# Altium PCB KNoT-Gateway Starter Board.PcbDoc
Units mm, origin at the board's own origin, x right, y up, seen from the top; angles counter-clockwise.
Board outline 56.06 x 92.56 mm, 2 copper layers (Top Layer, Bottom Layer); 37 components, 25 nets, 235 pads, 26 vias.
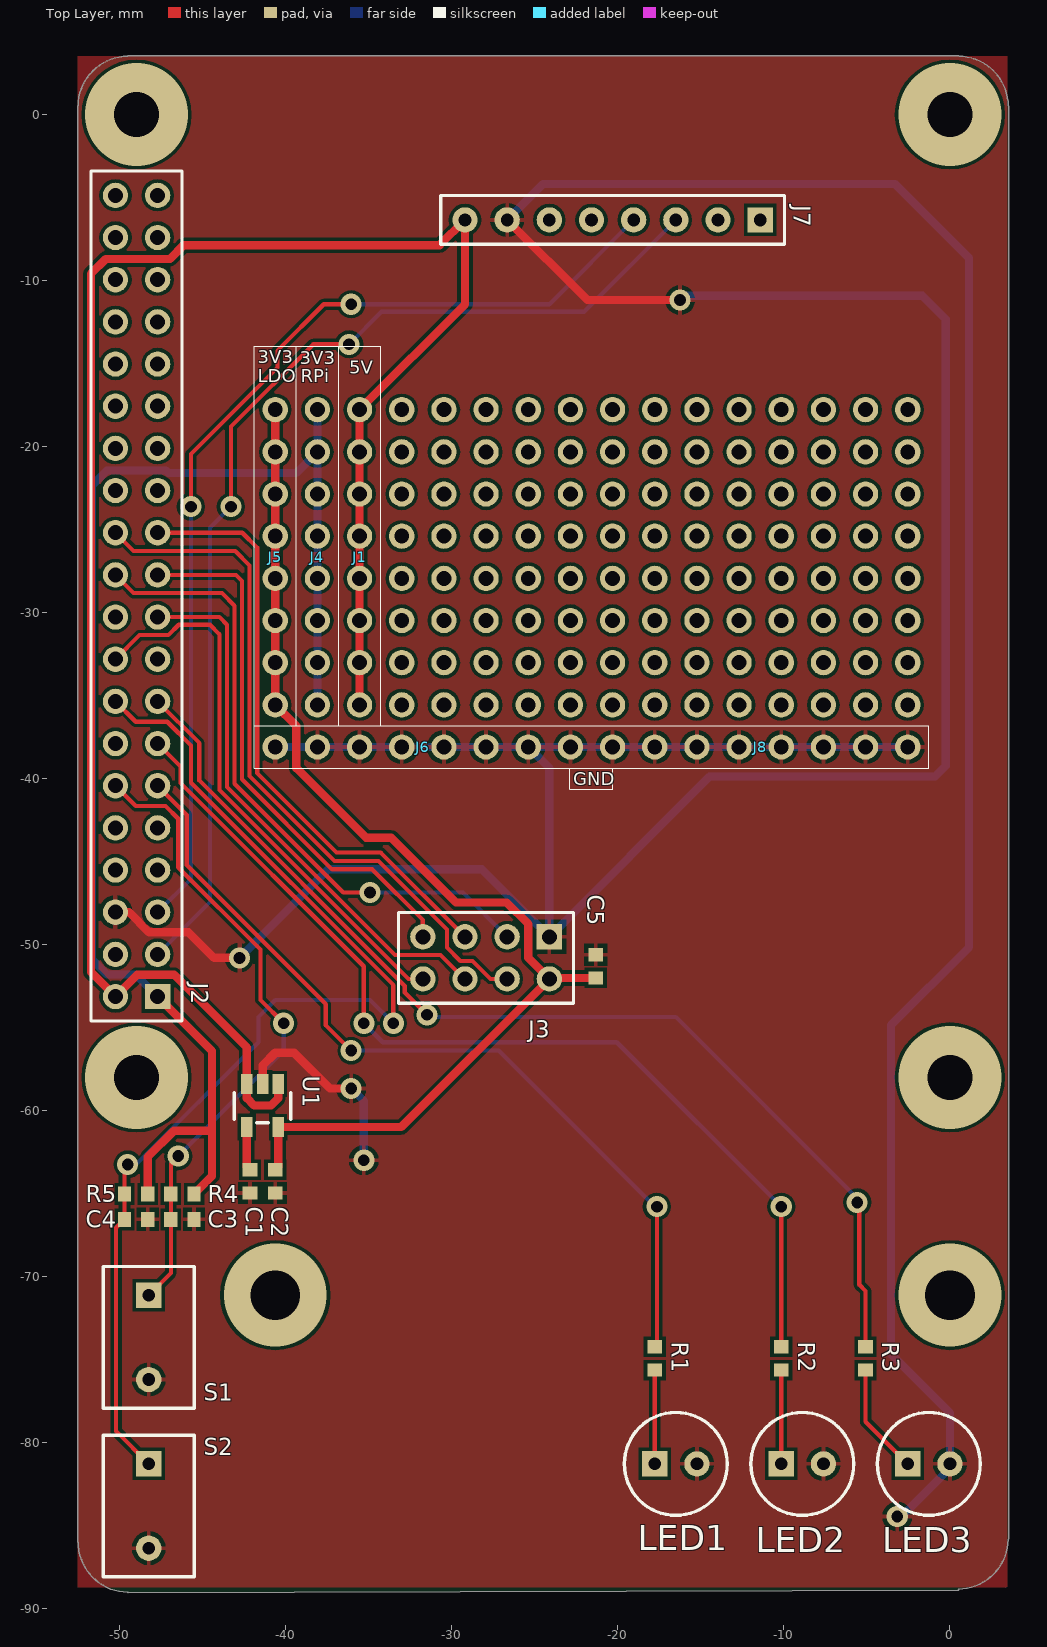
[diagram p0: Top Layer view]
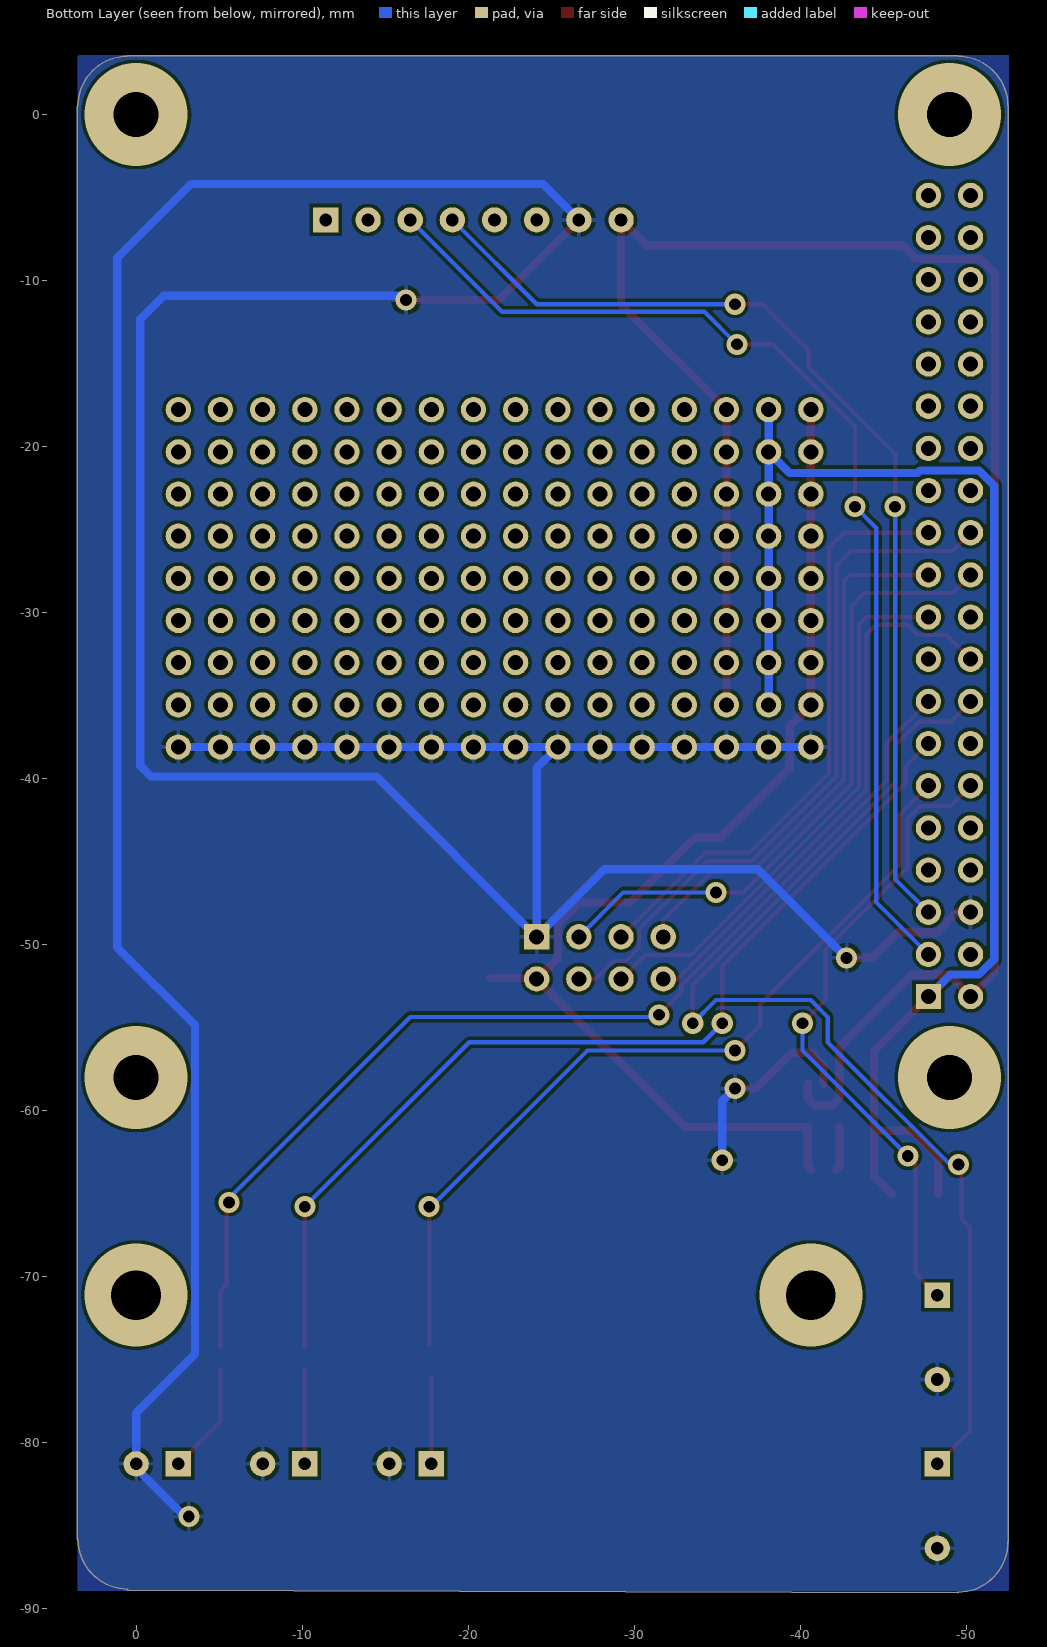
[diagram p1: Bottom Layer view, seen from below]

## Layer stack, top to bottom
Top Solder: solder mask 0.0102, Solder Resist, Dk 3.5
Top Layer: signal copper 0.0356
Dielectric 1: dielectric 0.32, FR-4, Dk 4.8
Bottom Layer: signal copper 0.0356
Bottom Solder: solder mask 0.0102, Solder Resist, Dk 3.5

## Board outline
-52.515,-85.996 cw(c-52.502,-85.996) -52.509,-85.985 cw(c-52.5,-85.954) -52.532,-85.954 -52.532,0.5 cw(c-52.5,0.5) -52.513,0.53 cw(c-49.5,0.5) -49.53,3.513 cw(c-49.5,3.5) -49.5,3.532 0.5,3.532 cw(c0.5,3.5) 0.53,3.513 cw(c0.5,0.5) 3.513,0.529 cw(c3.5,0.5) 3.532,0.5 3.532,-58.496 cw(c3.5,-58.5) 3.532,-58.5 3.532,-85.798 cw(c3.5,-85.798) 3.503,-85.831 cw(c0.49,-85.808) 0.513,-88.821 cw(c0.5,-88.851) 0.532,-88.851 cw(c0.5,-88.851) 0.5,-88.884 -49.502,-89.028 cw(c-49.502,-88.996) -49.531,-89.009 cw(c-49.502,-85.996)

## Design rules (kind name [scope] priority, off if disabled: settings)
Clearance [All] p1: gap=0.2
ComponentClearance [All] p1: gap=0.254 collisioncheckmode=3 verticalgap=0.254 showdistances=TRUE
HoleSize [All] p1: absolutevalues=TRUE maxlimit=3 minlimit=0.3 maxpercent=80.000 minpercent=20.000
MinimumAnnularRing [All] p1: minimumring=0.2
MinimumSolderMaskSliver [All] p1: minsoldermaskwidth=0.064
PermittedLayers [All] p1: toplayerpermitted=TRUE bottomlayerpermitted=TRUE
PolygonConnect [All] p1: connectstyle=Relief reliefconductorwidth=0.254 reliefentries=4 polygonreliefangle="90 Angle" airgapwidth=0.254
RoutingVias [All] p1: holewidth=0.711 width=1.27 viastyle="Through Hole" minholewidth=0.711 minwidth=1.27 maxholewidth=0.711 maxwidth=1.27
SilkToSilkClearance [All] p1: silktosilkclearance=0.064
SilkToSolderMaskClearance [IsPad] p1: minsilkscreentomaskgap=0.064 clearancetoexposedcopper=TRUE
SolderMaskExpansion [All] p1: expansion=0.203
Width Width_Power [InNetClass('Power')] p1: maxlimit=0.5 minlimit=0.254 preferedwidth=0.5 minimp=50.000000 maximp=50.000000 favimp=50.000000
Width [All] p2: maxlimit=0.5 minlimit=0.2 preferedwidth=0.254 minimp=50.000000 maximp=50.000000 favimp=50.000000
24 further rules are at their usual default settings.

## Classes and differential pairs
component class "KNoT-Gateway Starter Board": C1 C2 C3 C4 C5 J1 J2 J3 J4 J5 J6 J7 J8 LED1 LED2 LED3 R1 R2 R3 R4 R5 S1 S2 U1

## Components (designator, comment, footprint, x,y, rotation, side; value= is the part's Value field where it differs from the comment)
C1 "Cap0603" CAPC1608L -42.164,-64.262 r270 top
C2 "Cap0603" CAPC1608L -40.64,-64.262 r270 top
C3 "Cap0603" CAPC1608L -46.228,-66.548 r0 top
C4 "Cap0603" CAPC1608L -49.022,-66.548 r0 top
C5 "Cap0603" CAPC1608L -21.336,-51.308 r90 top
J1 "Prototype Power Header" "Prototype Holes 1X8" -35.56,-17.78 r270 top
J2 "Extended Male/Female Header" "FEMALE HEADER 2X20" -48.995,-29 r90 top locked
J3 "nRF24L01+" nRF24L01+PA+LNA -27.94,-50.8 r0 top
J4 "Prototype Power Header" "Prototype Holes 1X8" -38.1,-17.78 r270 top
J5 "Prototype Power Header" "Prototype Holes 1X8" -40.64,-17.78 r270 top
J6 "Prototype Power Header" "Prototype Holes 1X8" -40.64,-38.1 r0 top
J7 "1x8 Extended Female Header" NFC_ITEAD_PN532 0,0 r0 top
J8 "Prototype Power Header" "Prototype Holes 1X8" -20.32,-38.1 r0 top
LED1 "LED PTH" "LED PTH" -17.78,-81.28 r0 top
LED2 "LED PTH" "LED PTH" -10.16,-81.28 r0 top
LED3 "LED PTH" "LED PTH" -2.54,-81.28 r0 top
R1 "RES_0402" CAPC1608L -17.78,-74.93 r90 top
R2 "RES_0402" CAPC1608L -10.16,-74.93 r90 top
R3 "RES_0402" CAPC1608L -5.08,-74.93 r90 top
R4 "RES_0402" CAPC1608L -46.228,-65.024 r180 top
R5 "RES_0402" CAPC1608L -49.022,-65.024 r180 top
S1 "200mils Push Button PTH" "Push-Button PTH" -48.26,-71.12 r270 top
S2 "200mils Push Button PTH" "Push-Button PTH" -48.26,-81.28 r270 top
U1 "MIC5205-3.3Y" SOT23-5 -41.402,-59.69 r180 top
? "Comment" "Prototype Holes 1X8" -2.54,-17.78 r270 top
? "Comment" "Prototype Holes 1X8" -5.08,-17.78 r270 top
? "Comment" "Prototype Holes 1X8" -7.62,-17.78 r270 top
? "Comment" "Prototype Holes 1X8" -10.16,-17.78 r270 top
? "Comment" "Prototype Holes 1X8" -12.7,-17.78 r270 top
? "Comment" "Prototype Holes 1X8" -15.24,-17.78 r270 top
? "Comment" "Prototype Holes 1X8" -17.78,-17.78 r270 top
? "Comment" "Prototype Holes 1X8" -20.32,-17.78 r270 top
? "Comment" "Prototype Holes 1X8" -22.86,-17.78 r270 top
? "Comment" "Prototype Holes 1X8" -25.4,-17.78 r270 top
? "Comment" "Prototype Holes 1X8" -27.94,-17.78 r270 top
? "Comment" "Prototype Holes 1X8" -30.48,-17.78 r270 top
? "Comment" "Prototype Holes 1X8" -33.02,-17.78 r270 top

## Footprints (in the part's own frame and the unit in brackets; to place one, negate y for a bottom-side part, rotate by r counter-clockwise, add the part's x,y. Pads: shape width x height; smd on the part's side, far side on the other; paste and mask are expansions set on the pad)
CAPC1608L [mm]
  rect 0.8x0.9 smd: 1(-0.7,0) 2(0.7,0)
  body extent -0.87,-0.48 0.87,0.48, height 0.85
"FEMALE HEADER 2X20" [mil] "Female Header 2x20, 2.54mm pitch"
  rect 60x60 hole 35.43: 1(-950,-50)
  round 60 hole 35.43: 2(-950,50) 3(-850,-50) 4(-850,50) 5(-750,-50) 6(-750,50) 7(-650,-50) 8(-650,50) 9(-550,-50) 10(-550,50) 11(-450,-50) 12(-450,50) 13(-350,-50) 14(-350,50) 15(-250,-50) 16(-250,50) 17(-150,-50) 18(-150,50) 19(-50,-50) 20(-50,50) 21(50,-50) 22(50,50) 23(150,-50) 24(150,50) 25(250,-50) 26(250,50) 27(350,-50) 28(350,50) 29(450,-50) 30(450,50) 31(550,-50) 32(550,50) 33(650,-50) 34(650,50) 35(750,-50) 36(750,50) 37(850,-50) 38(850,50) 39(950,-50) 40(950,50)
  silkscreen extent -1008,-108 1008,108, body extent -997,-102 997,100, height 380
"LED PTH" [mil]
  rect 60x60 hole 30: 1(0,0)
  round 60 hole 30: 2(100,0)
  silkscreen extent -72,-122 172,122, body extent -28,-59 128,79, height 212
NFC_ITEAD_PN532 [mil]
  rect 60x60 hole 30: 1(-450,-250)
  round 60 hole 30: 2(-550,-250) 3(-650,-250) 4(-750,-250) 5(-850,-250) 6(-950,-250) 7(-1050,-250) 8(-1150,-250)
  silkscreen extent -1208,-308 -392,-192, body extent -1750,-3000 150,100, height 591
nRF24L01+PA+LNA [mil] "nRF24L01+PA+LNA MODULE"
  rect 60x60 hole 35.43: 1(150,50)
  round 60 hole 35.43: 2(150,-50) 3(50,50) 4(50,-50) 5(-50,50) 6(-50,-50) 7(-150,50) 8(-150,-50)
  silkscreen extent -208,-108 207,108, body extent -302,-2439 292,125, height 232
"Prototype Holes 1X8" [mil] "Holes1X8"
  round 60 hole 35.43: 1(0,0) 2(100,0) 3(200,0) 4(300,0) 5(400,0) 6(500,0) 7(600,0) 8(700,0)
"Push-Button PTH" [mil]
  rect 60x60 hole 30: 1(0,0)
  round 60 hole 30: 2(200,0)
  silkscreen extent -68,-108 268,108, body extent -60,-100 260,100, height 130
SOT23-5 [mm]
  rect 0.69x1.2 smd: 1(-0.95,-1.3) 2(0,-1.3) 3(0.95,-1.3) 4(0.95,1.3) 5(-0.95,1.3)
  silkscreen extent -1.7,-0.77 1.7,1.05, body extent -1.5,-1.25 1.5,1.25, height 1.05

## Part data
C1 C2 C3 C4 C5: "4.7µF 10V Ceramic Capacitor X5R 0603"
J2: library part RPI2_GPIO, "RPi GPIO HEADER 2X20"
J3: "nRF24L01 2x4 HEADER"
J7: library part PN532_NFC, "PN532_NFC"
LED1 LED2 LED3: library part "LED 0603"
R1 R2 R3 R4 R5: "Precision Thick Film Chip Resistor, 10 Ohm to 1M Ohm Range, 1% and 0.5% Tolerance, 0805 Size, 1/8 W"
S1 S2: library part "Push-Button PTH", "Push Button"
U1: library part MIC5205-3V3, "MIC5205-3.3Y LDO"

## Via types
v1: diameter 1.27, hole 0.711, Top Layer to Bottom Layer, 20 vias
v2: diameter 6.2, hole 2.7, Top Layer to Bottom Layer, 4 vias
v3: diameter 6.2, hole 3, Top Layer to Bottom Layer, 2 vias

## Nets (pads, with @x,y where several pads share a name; then routed paths per layer and width w, separated by ;. In a path a pad name is that pad's centre, name@x,y a point inside that pad or via, vN(x,y) a via of type N, cw(c..) or ccw(c..) an arc to the next point about the centre after c; other vN are vias at no path point)
3V3_LDO: C2.1 C5.1 J3.2 J5.1 J5.2 J5.3 J5.4 J5.5 J5.6 J5.7 J5.8 U1.5 | length 69.3
  Top Layer w0.5: C2.1 -40.452,-63.374 U1.5 -33.05,-60.99 J3.2 ; J5.1 J5.2 J5.3 J5.4 J5.5 J5.6 J5.7 J5.8 -39.37,-36.83 -39.37,-39.37 -35.179,-43.561 -33.655,-43.561 -29.75,-47.466 -26.702,-47.466 -25.4,-48.768 -25.4,-50.8 J3.2 ; C5.1 -24.068,-52.008 J3.2
3V3_RPI: J2.1 J4.1 J4.2 J4.3 J4.4 J4.5 J4.6 J4.7 J4.8 R4.1 R5.1 | length 86.2
  Top Layer w0.5: R5.1 -48.322,-62.8 -46.736,-61.214 -44.45,-61.214 ; J2.1 -44.45,-56.405 -44.45,-61.214 ; R4.1 -44.45,-63.946 -44.45,-61.214
  Bottom Layer w0.5: J2.1@-47.73,-53.13 -49.058,-51.802 -50.772,-51.802 -51.689,-50.885 -51.689,-22.352 -50.775,-21.438 -47.228,-21.438 -47.076,-21.59 -39.37,-21.59 J4.2 ; J4.8 J4.7 J4.6 J4.5 J4.4 J4.3 J4.2 ; J4.1 J4.2
5V: J1.1 J1.2 J1.3 J1.4 J1.5 J1.6 J1.7 J1.8 J2.2 J7.8 U1.1 U1.3 | length 116.3
  Top Layer w0.5: U1.1 -40.452,-59.248 -40.894,-59.69 -41.91,-59.69 -42.352,-59.248 U1.3 -42.352,-56.2 -46.736,-51.816 -48.951,-51.816 J2.2 -51.579,-51.816 -51.584,-51.816 -51.738,-51.662 -51.738,-9.588 -50.85,-8.7 -46.978,-8.7 -46.152,-7.874 -30.734,-7.874 J7.8 -29.21,-11.43 J1.1 J1.2 J1.3 J1.4 J1.5 J1.6 J1.7 J1.8
GND: C1.2 C2.2 C3.2 C4.2 C5.2 J2.6 J3.1 J6.1 J6.2 J6.3 J6.4 J6.5 J6.6 J6.7 J6.8 J7.7 J8.1 J8.2 J8.3 J8.4 J8.5 J8.6 J8.7 J8.8 LED1.2 LED2.2 LED3.2 S1.2 S2.2 U1.2 | length 289.8
  Top Layer w0.5: J2.6@-50.27,-48.05 -49.444,-48.05 -48.232,-49.262 -45.861,-49.262 -44.323,-50.8 v1(-42.799,-50.8) ; U1.2 -41.402,-57.277 -40.64,-56.515 -39.497,-56.515 -37.338,-58.674 v1(-36.068,-58.674) ; J7.7 -21.844,-11.176 v1(-16.256,-11.176) ; LED1.2@-15.62,-81.28 LED1.2 ; LED2.2@-7.62,-81.661 LED2.2
  Bottom Layer w0.5: v1(-42.799,-50.8) -37.465,-45.466 -28.194,-45.466 J3.1 ; J6.1 J6.2 J6.3 J6.4 J6.5 J6.6 J6.7 ; v1(-36.068,-58.674) -35.306,-59.436 v1(-35.306,-62.992) ; J7.7 -24.511,-4.191 -3.302,-4.191 1.143,-8.636 1.143,-50.165 -3.55,-54.858 -3.55,-74.67 0,-78.22 LED3.2 0,-81.534 -3.048,-84.582 v1(-3.175,-84.455) ; v1(-16.256,-11.176) -16.002,-10.922 -1.651,-10.922 -0.254,-12.319 -0.254,-39.243 -0.889,-39.878 -14.478,-39.878 J3.1 ; J8.8 J8.7 J8.6 J8.5 J8.4 J8.3 J8.2 J8.1 J6.8 J6.7 ; J6.7 -24.13,-39.37 J3.1
LED1: J2.11 R1.2 | length 51.4
  Top Layer w0.254: J2.11@-47.73,-40.43 -45.974,-42.186 -45.974,-45.212 -37.592,-53.594 -37.592,-54.864 v1(-36.068,-56.388) ; R1.2@-17.653,-74.103 v1(-17.653,-65.786)
  Bottom Layer w0.254: v1(-36.068,-56.388) -27.178,-56.388 -17.78,-65.786 v1(-17.653,-65.786)
LED2: J2.13 R2.2 | length 60.2
  Top Layer w0.254: J2.13@-47.73,-37.89 -46.355,-39.265 -46.355,-40.259 -35.306,-51.308 v1(-35.306,-54.737) ; R2.2 v1(-10.16,-65.786)
  Bottom Layer w0.254: v1(-35.306,-54.737) -34.163,-55.88 -20.066,-55.88 v1(-10.16,-65.786)
LED3: J2.15 R3.2 | length 65.3
  Top Layer w0.254: J2.15@-47.73,-35.35 -45.212,-37.868 -45.212,-40.118 -32.839,-52.491 -32.839,-52.886 v1(-31.496,-54.229) ; v1(-5.588,-65.532) -5.461,-65.659 -5.461,-70.485 -5.08,-70.866 R3.2
  Bottom Layer w0.254: v1(-31.496,-54.229) -31.369,-54.356 -16.51,-54.356 -5.588,-65.278 v1(-5.588,-65.532)
NetC1_1: C1.1 U1.4 | length 2.6
  Top Layer w0.5: U1.4 -42.352,-63.374 C1.1
NetLED1_1: LED1.1 R1.1 | length 5.2
  Top Layer w0.254: LED1.1 -17.78,-76.048
NetLED2_1: LED2.1 R2.1 | length 5.7
  Top Layer w0.254: LED2.1 R2.1
NetLED3_1: LED3.1 R3.1 | length 6.7
  Top Layer w0.254: R3.1 -5.08,-78.74 LED3.1
NFC_IRQ: J7.5
NFC_MI: J7.2
NFC_RST: J7.6
NFC_SCK: J7.1
NFC_SCL: J2.5 J7.4 | length 61.5
  Top Layer w0.254: v1(-45.72,-23.622) -45.72,-20.447 -40.513,-15.24 -40.513,-14.224 -37.719,-11.43 v1(-36.068,-11.43)
  Bottom Layer w0.254: J2.5@-47.73,-48.05 -45.72,-46.04 v1(-45.72,-23.622) ; v1(-36.068,-11.43) -24.13,-11.43 J7.4
NFC_SDA: J2.3 J7.3 | length 65.6
  Top Layer w0.254: v1(-43.307,-23.622) -43.307,-18.796 -38.354,-13.843 v1(-36.195,-13.843)
  Bottom Layer w0.254: J2.3@-47.73,-50.59 -44.577,-47.437 -44.577,-24.892 v1(-43.307,-23.622) ; v1(-36.195,-13.843) -34.236,-11.884 -22.044,-11.884 J7.3
RF_CE: J2.22 J3.3 | length 38.9
  Top Layer w0.254: J2.22@-50.27,-27.73 -49.171,-28.829 -43.853,-28.829 -43.091,-29.591 -43.091,-40.313 -36.541,-46.863 v1(-34.925,-46.863)
  Bottom Layer w0.254: v1(-34.925,-46.863) -29.337,-46.863 J3.3
RF_CSN: J2.24 J3.4 | length 42.8
  Top Layer w0.254: J2.24@-50.27,-25.19 -49.171,-26.289 -43.053,-26.289 -42.183,-27.159 -42.183,-39.852 -37.077,-44.958 -34.424,-44.958 -30.299,-49.083 -30.299,-50.181 -29.499,-50.981 -28.759,-50.981 -27.67,-52.07 J3.4
RF_IRQ: J2.18 J3.8 | length 33.7
  Top Layer w0.254: J2.18@-50.27,-32.81 -48.819,-31.359 -47.082,-31.359 -46.457,-30.734 -44.577,-30.734 -43.999,-31.312 -43.999,-40.689 -32.618,-52.07 J3.8
RF_MISO: J2.21 J3.7 | length 32.6
  Top Layer w0.254: J2.21@-47.73,-27.73 -43.009,-27.73 -42.637,-28.102 -42.637,-40.04 -37.211,-45.466 -34.798,-45.466 -31.75,-48.514 J3.7
RF_MOSI: J2.19 J3.6 | length 33.3
  Top Layer w0.254: J2.19@-47.73,-30.27 -44.009,-30.27 -43.545,-30.734 -43.545,-40.501 -33.427,-50.619 -30.689,-50.619 -29.238,-52.07 J3.6
RF_SCK: J2.23 J3.5 | length 36.6
  Top Layer w0.254: J2.23@-47.73,-25.19 -42.628,-25.19 -41.729,-26.089 -41.729,-39.664 -36.943,-44.45 -34.29,-44.45 J3.5
SWITCH1: C3.1 J2.12 R4.2 S1.1 | length 39.3
  Top Layer w0.254: J2.12@-50.27,-40.43 -49.044,-41.656 -47.244,-41.656 -46.482,-42.418 -46.482,-45.346 -41.529,-50.299 -41.529,-53.34 v1(-40.132,-54.737) ; S1.1 -46.928,-69.788 C3.1 R4.2 -46.928,-63.184 v1(-46.482,-62.738)
  Bottom Layer w0.254: v1(-46.482,-62.738) -40.132,-56.388 v1(-40.132,-54.737)
SWITCH2: C4.1 J2.16 R5.2 S2.1 | length 68.2
  Top Layer w0.254: J2.16@-50.27,-35.35 -49.044,-36.576 -47.146,-36.576 -45.72,-38.002 -45.72,-40.252 -33.528,-52.444 v1(-33.528,-54.737) ; v1(-49.53,-63.246) -49.722,-63.438 R5.2 C4.1 -50.23,-67.056 -50.23,-79.31 S2.1
  Bottom Layer w0.254: v1(-49.53,-63.246) -49.022,-63.246 -41.656,-55.88 -41.656,-54.356 -40.64,-53.34 -34.925,-53.34 v1(-33.528,-54.737)
pads on no net: ?.1 ?.2 ?.3 ?.4 ?.5 ?.6 ?.7 ?.8 J2.4 J2.7 J2.8 J2.9 J2.10 J2.14 J2.17 J2.20 J2.25 J2.26 J2.27 J2.28 J2.29 J2.30 J2.31 J2.32 J2.33 J2.34 J2.35 J2.36 J2.37 J2.38 J2.39 J2.40
copper on no net:
  other v2: -49,-58 0,-58 -49,0 0,0
  other v3: -40.64,-71.12 0,-71.12

## Polygon pours and split planes (outlines as drawn)
GND on Bottom Layer "Bottom Layer-GND" (solid, pour order 6): -52.553,3.556 -52.553,-89.002 -52.476,-88.925 3.531,-88.925 3.531,3.48 3.581,3.531 3.556,3.556 -52.527,3.556
GND on Top Layer "Top Layer-GND" (solid, pour order 8): -52.553,3.556 -52.527,3.531 -52.527,-88.722 3.327,-88.722 3.48,-88.875 3.454,-88.849 3.454,3.505 -52.527,3.505 -52.553,3.531

## Silkscreen, mask and mechanical layers (free items; w line width, h text height)
Top Overlay:
  lines w0.064: -22.911,-39.395 -22.911,-40.64 -20.32,-40.64 -20.32,-39.37 ; -41.91,-36.83 -41.91,-13.97 -39.37,-13.97 ; -41.91,-36.83 -39.37,-36.83 ; -41.91,-36.83 -1.27,-36.83 -1.27,-39.37 -41.91,-39.37 -41.91,-36.83 ; -39.37,-36.83 -39.37,-13.97 ; -39.37,-36.83 -36.83,-36.83 ; -39.37,-36.83 -36.83,-36.83 ; -39.37,-13.97 -36.83,-13.97 ; -36.83,-36.83 -34.29,-36.83 -34.29,-13.97 -36.83,-13.97 ; -36.83,-36.83 -36.83,-13.97
  text "3V3" at -41.707,-14.986 h0.8
  text "3V3" at -39.167,-15.037 h0.8
  text "5V" at -36.195,-15.621 h0.8
  text "LDO" at -41.707,-16.129 h0.8
  text "RPi" at -39.116,-16.129 h0.8
  text "GND" at -22.7,-40.4 h0.8
Mechanical 1:
  lines w0.025: -52.502,-85.996 ccw(c-49.502,-85.996) -49.502,-88.996 ; -52.5,0.5 cw(c-49.5,0.5) -49.5,3.5 ; 0.5,-88.808 ccw(c0.49,-85.808) 3.49,-85.798 ; 0.5,3.5 cw(c0.5,0.5) 3.5,0.5
  lines w0.064: -52.5,-85.954 -52.5,-58.5 -52.5,0.5 ; -49.502,-88.996 0.5,-88.851 ; -49.5,3.5 0.5,3.5 ; 3.5,-85.798 3.5,-58.5 3.5,0.5